# Altium PCB PCB1.PcbDoc (part 3 of 3)
Units mil, origin at the board's own origin, x right, y up, seen from the top; angles counter-clockwise.
Board outline 2810.96 x 1006.14 mil, 4 copper layers (L1, L2, L3, L4), stack 61.583 mil thick; 58 components, 71 nets, 287 pads, 129 vias.
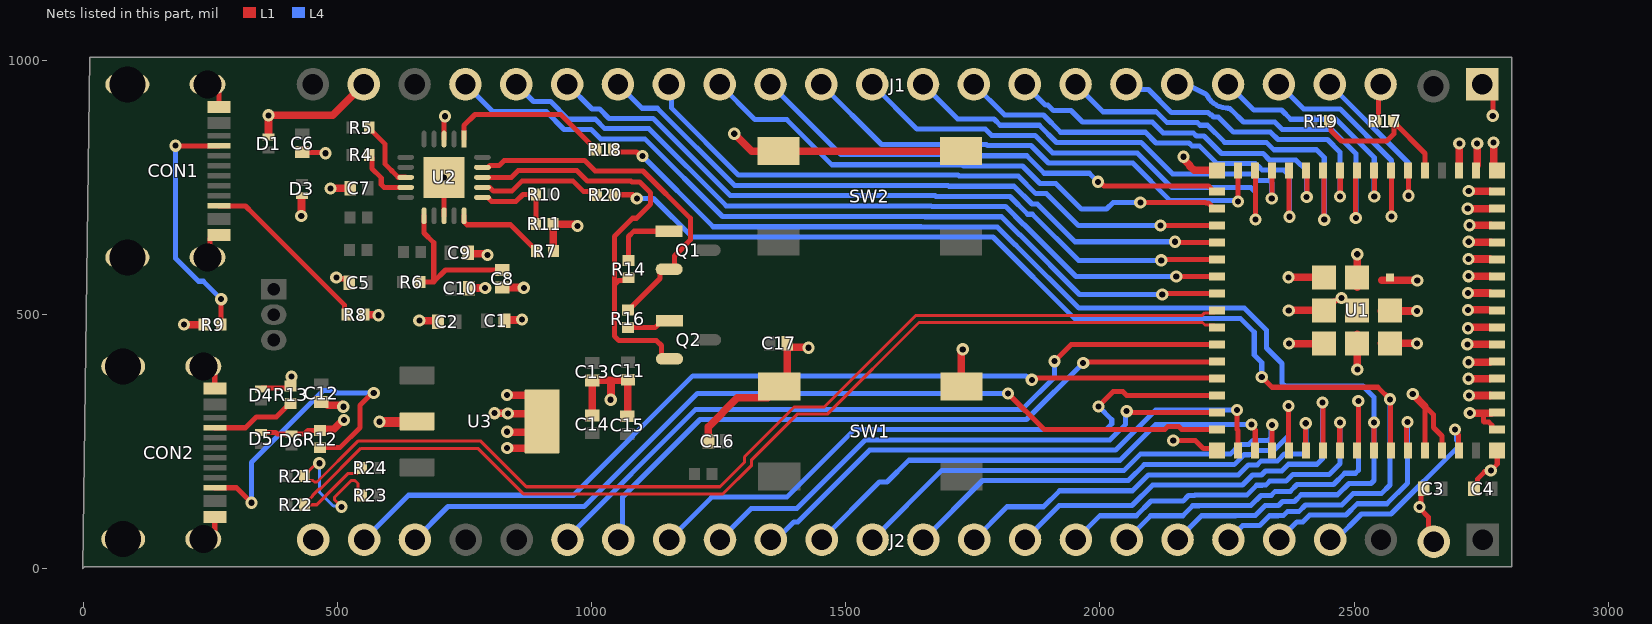
[diagram p4: the nets of this part, all layers, seen from the top]

## Via types
v1: diameter 24, hole 12, L1 to L4, tented both sides, 129 vias

## Nets (pads, with @x,y where several pads share a name; then routed paths per layer and width w, separated by ;. In a path a pad name is that pad's centre, name@x,y a point inside that pad or via, vN(x,y) a via of type N, cw(c..) or ccw(c..) an arc to the next point about the centre after c; other vN are vias at no path point) (continued)
CON_GPIO0: J1.3 R17.2 | length 76.1
  L1 w10: R17.2@2543.35,880.64 2547.73,885.02 2547.73,948.73 J1.3@2552.11,953.11
DTR_FTDI: Q2.2 R14.3 U2.18 | length 842.2
  L1 w10: U2.18@785.41,770 808.34,770 842.19,770 855.47,783.27 971.65,783.27 992.32,762.61 1078.05,762.61 1079.55,761.11 1094.73,761.11 1116.16,739.68 1116.16,717.31 1088.53,689.68 1080.59,689.68 1044.89,653.97 1044.89,558.29 ; R14.3@1072.96,572.47 1067.33,566.84 1053.44,566.84 1044.89,558.29 ; Q2.2@1140.72,413.06 1143.29,413.06 Q2.2@1153.6,413.06 ; Q2.2@1140.72,415.63 1137.5,418.85 1137.5,439.32 1127.47,449.36 1053.75,449.36 1044.96,458.15 1044.96,523.6 1044.89,523.67 1044.89,558.29
ESP_USB_N: R21.3 R23.3 U1.23 | length 2287.1
  L1 w6.03: R21.3@435.11,182.22 435.11,181.04 442.72,173.42 452.45,173.42 455.15,170.72 460.15,170.72 540.53,251.11 782.22,251.11 871.81,161.51 1252.98,161.51 1300.98,209.52 1300.98,220.42 1398.81,318.25 1457.92,318.25 1638.39,498.72 2201.45,498.72 2206.3,503.58 2225.46,503.58 U1.23@2230.32,508.44 ; R21.3@435.11,183.4 452.91,201.2 453.38,201.2 459.88,207.7 v1(464.74,207.7) ; v1(508.51,122.04) 494.53,136.02 494.53,141.09 527.42,173.98 534.7,173.98 540.65,168.03 540.65,152.09 R23.3@548.27,144.47
  L4 w6.03: v1(464.74,207.7) 464.74,151.04 492.27,123.51 507.04,123.51 v1(508.51,122.04)
ESP_USB_P: R22.3 R24.3 U1.24 | length 2172.9
  L1 w6.03: R24.3@548.27,198.5 548.27,197.32 538.97,188.01 521.61,188.01 459.73,126.13 R22.3@435.4,126.13 435.4,127.31 451.54,143.46 451.54,144.55 463.68,156.69 465.96,156.69 546.35,237.08 776.4,237.08 866,147.48 1258.79,147.48 1315.01,203.71 1315.01,214.61 1404.62,304.22 1463.73,304.22 1644.2,484.69 2201.94,484.69 2206.79,479.83 2225.46,479.83 U1.24@2230.32,474.97
FTDI_USB_N: R4.3 U2.9 | length 118.5
  L1 w10: R4.3@562.91,814.43 568.07,809.27 568.07,787.62 586.53,769.16 586.53,756.17 592.39,750.32 U2.9@634.59,750.32
FTDI_USB_P: R5.3 U2.8 | length 135.8
  L1 w10: R5.3@562.91,867.74 562.91,866.56 594.26,835.2 594.26,795.95 607.12,783.09 619.98,770.23 634.36,770.23 U2.8@634.59,770
GND: C1.0 C2.0 C3.0 C4.0 C5.0 C6.0 C7.0 C8.0 C9.0 C10.0 C11.0 C12.0 C13.0 C14.0 C15.0 C16.0 C17.0 CON1.A1B12 CON1.B1A12 CON1.S1 CON1.S2 CON1.S3 CON1.S4 CON2.A1B12 CON2.B1A12 CON2.S1 CON2.S2 CON2.S3 CON2.S4 D1.B9 D3.B9 D4.B9 D5.B9 D6.B9 J1.1 J1.23 J2.2 J2.24 R7.2 R8.2 R9.2 R11.2 R12.2 R13.2 SW1.1 SW1.2 SW2.1 SW2.2 U1.1 U1.2 U1.42 U1.43 U1.46 U1.47 U1.48 U1.49 U1.50 U1.51 U1.52 U1.53 U1.54 U1.55 U1.56 U1.57 U1.58 U1.59 U1.60 U1.61 U1.62 U1.63 U1.64 U1.65 U1.66 U1.67 U1.68 U1.69 U1.70 U1.71 U1.72 U1.73 U2.3 U2.13 U2.21 U3.2 U3.4 | length 4855
  L1 w10: CON2.S2@236.47,58.35 244.27,58.35 259.11,73.19 CON2.B1A12@259.11,102.44 ; CON2.S1@236.47,398.51 244.27,398.51 259.11,383.67 CON2.A1B12@259.11,354.41 ; CON1.S2@244.76,612.65 249.76,617.65 249.76,649.94 256.57,656.75 CON1.B1A12@267.4,656.75 ; CON1.S1@244.76,952.81 252.56,952.81 267.4,937.97 CON1.A1B12@267.4,908.71 ; D4.B9@350.23,353.91 352.12,355.8 404.31,355.8 R13.2@408.04,359.53 ; D5.B9@350.45,268.54 378.81,268.54 382.1,265.25 D6.B9@410.45,265.25 435.29,265.25 442.39,272.35 R12.2@464.98,272.35 ; D1.B9@365.07,849.12 365.07,859.13 ; R13.2@408.3,359.79 408.89,360.39 408.89,377.15 v1(409.74,378) ; C6.0@433.67,820.42 435.29,818.81 475.37,818.81 v1(476.7,817.48) ; R12.2@466.47,272.35 R12.2@466.14,272.35 R12.2@464.98,272.35 ; R12.2@467.4,274.76 R12.2@464.98,272.35 ; C12.0@475.54,328.53 475.54,328.17 C12.0@477.53,326.18 ; v1(486.62,748.26) v1@486.88,748.52 ; v1(498.19,573.34) 500.87,570.66 519.99,570.66 C5.0@526.14,564.51 ; v1@509.68,326.18 509.68,321.67 509.68,321.18 v1(511.96,318.9) ; v1@510.87,292.59 v1(513.41,292.59) ; C7.0@524.27,748.52 C7.0@524.65,748.14 ; R8.2@550,498.84 R8.2@550.7,499.54 ; v1@580.59,499.54 v1(581.29,498.84) ; U2.13@710,694.59 v1(710,770) ; U2.3@710,845.41 710,888.45 v1(711.9,890.34) ; C9.0@758.54,627.98 758.54,624.97 C9.0@763.87,619.64 ; C10.0@758.65,557.97 C10.0@764.1,552.52 ; v1@790.74,552.52 v1(790.94,552.72) ; v1@793.18,619.64 v1(795.54,617.27) ; U3.4@868.8,237.5 U3.4@872.48,233.82 ; U3.4@873.58,305.38 874.52,304.45 874.52,271 U3.4@904.91,240.62 ; R11.2@924.55,678.4 924.92,678.03 R11.2@925.2,677.75 ; R7.2@924.92,625.47 R7.2@925.29,625.09 ; C13.0@1001.6,370.34 C13.0@1002.43,371.17 ; C15.0@1070.56,300.08 C15.0@1071.2,300.72 ; C11.0@1071.01,371.17 C11.0@1071.2,371.36 ; SW1.2@1346.81,336.26 SW1.2@1369.37,358.82 SW1.2@1385.17,374.62 ; v1@1727.63,429.22 v1(1730.27,431.86) ; v1(2144.3,252.65) 2187.72,252.65 2203.39,236.98 2226.18,236.98 U1.64@2230.32,232.85 ; v1@2164.29,806.89 v1(2164.29,810.68) ; v1@2375.09,507.25 v1@2376.28,508.44 ; U1.72@2440.95,508.44 2459.58,527.06 2464.37,527.06 2467.29,529.99 2472.38,529.99 v1(2475.06,532.66) ; v1(2628.77,121.97) v1@2630,120.74 ; C3.0@2637.62,152.85 2636.01,152.85 2631.45,148.29 2631.45,122.2 v1@2630,120.74 ; U1.42@2639.77,232.85 2639.26,233.36 2639.26,320.01 2656.12,303.15 2656.12,278.27 2672.99,261.4 2672.99,233.1 U1.43@2673.24,232.85 ; J2.2@2656.95,64.86 2646.5,75.31 2646.5,101.51 2630,118.01 v1@2630,120.74 ; v1(2724.29,473.29) v1@2726.56,475.55 ; v1(2724.29,509.3) v1@2724.44,509.45 ; v1(2725.51,643.44) v1@2726.84,642.11 ; v1(2727.56,306.37) v1@2727.89,306.05 ; C4.0@2735.85,157.46 2742.45,164.06 2742.45,176.48 2756.92,190.96 2766.18,190.96 v1(2768.86,193.63) ; 2748.66,306.05 2754.38,300.33 2754.38,289.94 2755.82,288.49 2764.9,288.49 2770.76,282.64 2770.76,277.06 2773.63,274.19 U1.46@2781.5,274.19 ; U1.48@2768.06,340.92 U1.48@2769.11,339.87 ; v1@2772.36,190.13 2772.36,196.82 2781.5,205.96 U1.65@2781.5,232.85 ; v1(2772.79,891.05) J1.1@2772.79,933.41
  L1 w15: v1@199.13,480.04 R9.2@236.73,480.04 ; v1(364.54,892.12) 491.12,892.12 J1.23@552.11,953.11 ; v1@364.81,891.85 364.81,859.4 365.07,859.13 ; v1@429.78,694.81 429.78,713.61 D3.B9@429.78,732.41 ; R12.2@467.4,274.76 493.05,274.76 v1@510.87,292.59 ; C12.0@477.53,326.18 481.62,322.09 509.26,322.09 509.68,321.67 511.96,319.4 v1(511.96,318.9) ; v1@486.88,748.52 C7.0@524.27,748.52 ; R8.2@550.7,499.54 v1@580.59,499.54 ; v1@662.08,487.74 C2.0@699.68,487.74 ; C9.0@763.87,619.64 v1@793.18,619.64 ; C10.0@764.1,552.52 v1@790.74,552.52 ; v1(809.46,306.21) 809.88,305.8 838.37,305.8 v1@838.79,305.38 ; C1.0@828.73,487.86 830.45,489.58 862.28,489.58 v1(863.45,490.75) ; C8.0@828.73,553.43 v1@866.33,553.43 ; v1(833.87,341.99) 834.15,341.7 U3.4@872.48,341.7 ; v1(834.23,237.5) U3.4@868.8,237.5 ; v1@834.88,268.97 U3.4@872.48,268.97 ; v1(835.44,305.38) v1@838.79,305.38 ; v1@839.6,304.57 v1@838.79,305.38 ; U3.4@873.58,305.38 v1@838.79,305.38 ; R7.2@924.92,625.47 R11.2@924.92,678.03 ; R11.2@925.2,677.75 966.51,677.75 969.93,674.34 v1(972.36,674.34) ; C14.0@1001.6,301.46 C13.0@1001.6,370.34 ; C13.0@1002.43,371.17 C11.0@1071.01,371.17 ; v1@1038.47,333.35 1038.47,370.95 ; C15.0@1071.2,300.72 C11.0@1071.2,371.36 ; C16.0@1229.96,251.12 1229.68,251.4 1229.68,278.99 1286.95,336.26 SW1.2@1346.81,336.26 ; v1(1280.77,855.83) 1315.05,821.54 SW2.2@1368.19,821.54 SW2.1@1726.46,821.54 ; SW1.2@1385.17,374.62 C17.0@1385.17,443.62 ; C17.0@1388.57,435.55 v1@1426.17,435.55 ; SW1.1@1727.63,358.82 v1@1727.63,429.22 ; v1@2164.29,806.89 2177.04,794.14 2177.04,792.32 2185.33,784.03 U1.63@2230.32,784.03 ; v1@2371.2,573.4 U1.71@2440.95,573.4 ; v1@2372.29,443.07 U1.73@2442.04,443.07 ; v1@2376.28,508.44 U1.72@2440.95,508.44 ; U1.69@2506.09,553.98 v1@2506.09,618.67 ; v1@2506.4,392.07 U1.70@2506.4,461.82 ; U1.68@2553.9,443.64 v1@2623.65,443.64 ; U1.67@2553.9,507.17 v1@2623.65,507.17 ; 2554.44,567.45 v1@2624.19,567.45 ; v1(2615.34,343.93) 2639.26,320.01 ; U1.2@2706.9,794.02 v1(2706.9,836.38) ; v1(2722.66,441.66) 2765.01,441.66 ; v1(2723.5,708.51) U1.59@2765.86,708.51 ; v1(2724.07,542.64) U1.54@2766.43,542.64 ; v1@2724.44,509.45 2762.9,509.45 ; v1(2724.76,374.08) U1.49@2767.12,374.08 ; v1(2724.78,406.35) U1.50@2767.13,406.35 ; v1(2724.8,575.71) U1.55@2767.16,575.71 ; v1(2724.8,609.56) U1.56@2767.16,609.56 ; v1(2725.45,743.01) U1.60@2767.81,743.01 ; v1(2725.71,340.92) U1.48@2768.06,340.92 ; v1@2726.56,475.55 2764.31,475.55 ; v1(2726.75,675.96) U1.58@2769.11,675.96 ; v1@2726.84,642.11 U1.57@2769.76,642.11 ; v1@2727.89,306.05 U1.47@2769.84,306.05 ; U1.1@2742.03,794.06 v1(2742.03,836.42) ; U1.62@2774.3,796.01 v1(2774.3,838.36)
  L1 w20: v1@583.6,288.8 621.19,288.8
  other v1: 834.23,269.62 582.94,289.45 1037.81,332.7 2506.31,391.98 1426.82,434.9 2372.2,443.16 2623.73,443.55 198.48,480.69 661.43,488.39 2623.73,507.09 2371.39,508.28 866.98,552.78 2624.28,567.36 2371.12,573.48 2506.17,618.76 429.13,694.16
GPIO0: R17.3 R19.3 U1.4 | length 305.9
  L1 w10: R19.3@2448.78,880.64 2454.41,875.01 2454.41,861.87 2475.05,841.24 2563.55,841.24 2578.23,855.92 2578.23,879.78 R17.3@2577.37,880.64 ; R17.3@2577.37,879.46 2639.65,817.18 2639.65,784.15 U1.4@2639.77,784.03
GPIO1: J1.4 U1.5 | length 330
  L1 w10: v1@2607.18,734.2 U1.5@2607.18,780.9
  L4 w10: J1.4@2452.11,953.11 2606.84,798.38 v1(2606.84,733.86)
GPIO2: J1.5 U1.6 | length 476.5
  L1 w10: v1@2573.15,693.73 U1.6@2573.15,776.48
  L4 w10: J1.5@2352.11,953.11 2400.94,904.29 2472.65,904.29 2573.72,803.22 v1(2573.72,693.16)
GPIO3: J1.6 U1.7 | length 470.2
  L1 w10: v1@2539.96,733.03 U1.7@2539.96,779.73
  L4 w10: J1.6@2252.11,953.11 2302.72,902.5 2357.14,902.5 2375.35,884.29 2464.37,884.29 2539.62,809.04 v1(2539.62,732.69)
GPIO4: J1.7 U1.8 | length 614.2
  L1 w10: v1@2502.79,690.56 U1.8@2502.79,773.32
  L4 w10: J1.7@2152.11,953.11 2160.48,955.88 2164.47,955.88 2208.03,933.99 2209.17,932.85 ; 2209.19,932.82 2210.23,931.78 ccw(c2252.11,953.11) 2248.48,906.25 2252.26,905.96 ccw(c2254.58,918.05) 2255.44,905.77 2258.37,902.84 2282.28,878.93 2343.96,878.93 2358.6,864.29 2456.08,864.29 2503.36,817.02 v1(2503.36,689.99)
GPIO5: J1.8 U1.9 | length 609.2
  L1 w10: v1@2472.73,733.03 U1.9@2472.73,779.73
  L4 w10: J1.8@2052.11,953.11 2062.45,942.78 2095.44,942.78 2140.54,897.68 2212.8,897.68 2217.91,892.57 2220.06,892.57 2223.64,888.98 2232.7,888.98 2262.76,858.93 2335.68,858.93 2350.32,844.29 2447.8,844.29 2472.39,819.7 v1(2472.39,732.69)
GPIO6: J1.9 U1.10 | length 753.9
  L1 w10: v1@2440.67,687.39 U1.10@2440.67,770.15
  L4 w10: J1.9@1952.11,953.11 2006.04,899.19 2110.74,899.19 2132.25,877.68 2192.04,877.68 2197.15,872.57 2211.77,872.57 2245.41,838.93 2327.39,838.93 2342.03,824.29 2426.24,824.29 2441.24,809.29 v1(2441.24,686.82)
GPIO7: J1.10 U1.11 | length 723.3
  L1 w10: v1@2407.07,731.86 U1.11@2407.07,778.56
  L4 w10: J1.10@1852.11,953.11 1892.69,912.54 1897.52,912.54 1908.42,901.64 1943.01,901.64 1965.91,878.74 2102.9,878.74 2123.97,857.68 2183.76,857.68 2189.95,851.49 2204.56,851.49 2239.11,816.94 2321.1,816.94 2333.75,804.29 2385.46,804.29 2406.73,783.03 v1(2406.73,731.52)
GPIO8: J1.11 U1.12 | length 858.9
  L1 w10: v1@2372.21,693.1 U1.12@2372.21,775.85
  L4 w10: J1.11@1752.11,953.11 1812.69,892.54 1889.23,892.54 1923.03,858.74 2089.48,858.74 2110.55,837.68 2175.47,837.68 2181.66,831.49 2196.28,831.49 2230.83,796.94 2306.14,796.94 2312.15,790.93 2312.74,790.93 2319.38,784.29 2362.18,784.29 2372.78,773.69 v1(2372.78,692.53)
GPIO9: J1.12 U1.13 | length 843
  L1 w10: v1@2338.38,728.98 U1.13@2338.38,775.68
  L4 w10: J1.12@1652.11,953.11 1720.43,884.8 1791.69,884.8 1803.95,872.54 1880.95,872.54 1914.74,838.74 2081.2,838.74 2143,776.94 2297.85,776.94 2303.86,770.93 2304.45,770.93 2311.1,764.29 2332.18,764.29 2338.03,758.43 v1(2338.03,728.64)
GPIO10: J1.13 U1.14 | length 978.2
  L1 w10: v1@2305.65,688.03 U1.14@2305.65,770.78
  L4 w10: J1.13@1552.11,953.11 1640.43,864.8 1774.92,864.8 1787.18,852.54 1872.67,852.54 1907.13,818.07 2073.58,818.07 2141.88,749.78 2297.33,749.78 2306.22,740.88 v1(2306.22,687.46)
GPIO11: J1.14 U1.15 | length 963.4
  L1 w10: v1(2271.48,722.78) 2271.82,723.12 U1.15@2271.82,771.24
  L4 w10: J1.14@1452.11,953.11 1570.41,834.82 1776.61,834.82 1778.89,832.54 1864.38,832.54 1898.85,798.07 2064.74,798.07 2138.6,724.21 2270.04,724.21 v1(2271.48,722.78)
GPIO12: J1.15 U1.16 | length 966.4
  L1 w10: v1(1996.16,761.23) 1999.95,761.23 2007.9,753.28 2213.72,753.28 2219.58,747.42 2219.58,745.56 2222.45,742.69 U1.16@2230.32,742.69
  L4 w10: J1.15@1352.11,953.11 1490.41,814.82 1737.65,814.82 1739.93,812.54 1856.1,812.54 1890.57,778.06 1979.3,778.06 v1@1996.13,761.23
GPIO13: J1.16 U1.17 | length 1091
  L1 w10: v1(2079.47,720.73) 2207.44,720.73 2208.36,719.82 2213.72,719.82 2219.58,713.96 2219.58,712.1 2222.45,709.22 U1.17@2230.32,709.22
  L4 w10: J1.16@1252.11,953.11 1321.63,883.6 1384.06,883.6 1472.84,794.82 1729.37,794.82 1731.65,792.54 1847.81,792.54 1882.29,758.06 1913.23,758.06 1963.51,707.79 2013.12,707.79 2026.07,720.73 v1(2079.47,720.73)
GPIO14: J1.17 U1.18 | length 1215.9
  L1 w10: v1@2120.56,675.76 U1.18@2230.32,675.76
  L4 w10: J1.17@1152.11,953.11 1157.65,947.57 1157.65,906.11 1288.94,774.82 1721.08,774.82 1723.36,772.54 1839.53,772.54 1874,738.06 1895.03,738.06 1957.53,675.57 v1(2118.97,675.57)
GPIO15: J1.18 U1.19 | length 1306.4
  L1 w10: v1@2148.4,642.99 2149.1,642.3 U1.19@2230.32,642.3
  L4 w10: J1.18@1052.11,953.11 1099.31,905.91 1129.56,905.91 1281.11,754.37 1701.58,754.37 1703.41,752.54 1831.25,752.54 1866.25,717.54 1876.97,717.54 1951.16,643.35 v1(2147.96,643.35)
GPIO16: J1.19 U1.20 | length 1426.5
  L1 w10: v1@2115.71,608.83 U1.20@2230.32,608.83
  L4 w10: J1.19@952.11,953.11 1000.94,904.29 1016.04,904.29 1034.42,885.91 1121.28,885.91 1272.83,734.37 1675.98,734.37 1677.81,732.54 1822.96,732.54 1857.96,697.54 1867.16,697.54 1957.85,606.84 v1(2120.58,606.84)
GPIO17: J1.20 U1.21 | length 1534.2
  L1 w10: v1@2150.71,575.37 U1.21@2230.32,575.37
  L4 w10: J1.20@852.11,953.11 886.19,919.03 919.72,919.03 954.47,884.29 1007.76,884.29 1026.13,865.91 1113,865.91 1264.88,714.03 1668.03,714.03 1669.52,712.54 1814.68,712.54 1849.68,677.54 1850.55,677.54 1952.92,575.16 v1(2150.11,575.16)
GPIO18: J1.21 U1.22 | length 1651.3
  L1 w10: v1@2120.9,541.9 U1.22@2230.32,541.9
  L4 w10: J1.21@752.11,953.11 806.19,899.03 911.44,899.03 946.19,864.29 999.48,864.29 1017.85,845.91 1104.71,845.91 1257.65,692.98 1655.98,692.98 1656.42,692.54 1806.39,692.54 1841.4,657.54 1842.26,657.54 1960.08,539.72 v1(2122.72,539.72)
GPIO21: J2.19 U1.25 | length 1457.4
  L1 w10: v1(1910.52,408.48) 1943.55,441.51 U1.25@2230.32,441.51
  L4 w10: J2.19@952.83,57.49 952.83,61.42 1205.14,313.74 1847.46,313.74 1910.52,376.79 v1(1910.52,408.48)
GPIO26: J2.18 U1.26 | length 1367
  L1 w10: v1(1967.15,405.14) 1968.6,406.59 2228.87,406.59 U1.26@2230.32,408.04
  L4 w10: J2.18@1052.83,57.49 1061.2,65.86 1061.2,141.51 1213.43,293.74 1855.75,293.74 v1(1967.15,405.14)
GPIO33: J2.17 U1.28 | length 1258.1
  L1 w10: v1(1997.14,319.64) 2026.01,348.51 2045.34,348.51 2052.74,341.11 U1.28@2230.32,341.11
  L4 w10: J2.17@1152.83,57.49 1236.42,141.08 1384.21,141.08 1516.87,273.74 2011.71,273.74 2023.23,285.26 2023.23,293.54 v1(1997.14,319.64)
GPIO34: J2.16 U1.29 | length 1097.2
  L1 w10: v1(2052.66,310.19) 2055.2,307.65 U1.29@2230.32,307.65
  L4 w10: J2.16@1252.83,57.49 1314.11,118.77 1403.89,118.77 1538.85,253.74 2020,253.74 2049.98,283.72 2049.98,307.51 v1(2052.66,310.19)
GPIO35: J2.15 U1.31 | length 1103.1
  L1 w10: v1(2269.95,312.28) 2269.95,274.29 2272.03,272.21 2272.03,233.21 U1.31@2271.66,232.85
  L4 w10: J2.15@1352.83,57.49 1363.24,57.49 1398.06,92.32 1405.71,92.32 1547.13,233.74 2031.08,233.74 2109.63,312.28 v1(2269.95,312.28)
GPIO36: J2.14 U1.32 | length 988.9
  L1 w10: v1(2298.28,284.14) 2298.28,280.36 2305.54,273.09 U1.32@2305.54,237.63
  L4 w10: J2.14@1452.83,57.49 1566.17,170.84 1581.23,170.84 1624.13,213.74 2039.37,213.74 2109.77,284.14 v1(2298.28,284.14)
GPIO37: J2.13 U1.33 | length 939.6
  L1 w10: U1.33@2338.46,236.28 v1@2338.46,282.98
  L4 w10: J2.13@1552.83,57.49 1689.07,193.74 2047.65,193.74 2079.57,225.65 2256.53,225.65 2275.37,244.49 2285.3,244.49 2285.52,244.72 2293.01,244.72 2300.86,252.57 2330.94,252.57 2336.8,258.42 2336.8,281.31 v1(2338.8,283.32)
GPIO38: J2.12 U1.34 | length 943.6
  L1 w10: U1.34@2371.36,236.85 v1@2371.36,319.6
  L4 w10: J2.12@1652.83,57.49 1769.07,173.74 2055.94,173.74 2087.19,204.99 2264.15,204.99 2283.66,224.49 2293.58,224.49 2293.8,224.72 2301.29,224.72 2309.14,232.57 2341.33,232.57 2370.79,262.02 v1(2370.79,320.17)
GPIO39: J2.11 U1.35 | length 825.6
  L1 w10: U1.35@2404.51,239.41 v1@2404.51,286.1
  L4 w10: J2.11@1752.83,57.49 1817.5,122.17 1889.22,122.17 1920.79,153.74 2064.22,153.74 2095.47,184.99 2272.43,184.99 2291.94,204.49 2301.86,204.49 2302.09,204.72 2309.57,204.72 2317.42,212.57 2349.62,212.57 2362.85,225.8 2399,225.8 2404.86,231.66 v1(2404.86,286.44)
GPIO40: J2.10 U1.36 | length 844.4
  L1 w10: U1.36@2438.55,243.82 v1@2438.55,326.58
  L4 w10: J2.10@1852.83,57.49 1919.83,124.49 2063.26,124.49 2103.76,164.99 2280.72,164.99 2300.22,184.49 2310.15,184.49 2310.37,184.72 2317.86,184.72 2325.71,192.57 2357.9,192.57 2371.14,205.8 2427.21,205.8 2437.98,216.57 v1(2437.98,327.15)
GPIO41: J2.9 U1.37 | length 708.6
  L1 w10: U1.37@2471.74,240.58 v1@2471.74,287.27
  L4 w10: J2.9@1952.83,57.49 1999.83,104.49 2071.54,104.49 2100.64,133.59 2163.71,133.59 2174.32,144.19 2186.1,144.19 2186.9,144.99 2289,144.99 2308.51,164.49 2318.43,164.49 2318.66,164.72 2326.14,164.72 2333.99,172.57 2366.19,172.57 2379.42,185.8 2450.99,185.8 2472.08,206.9 v1(2472.08,287.62)
GPIO42: J2.8 U1.38 | length 731.2
  L1 w10: U1.38@2508.91,246.99 v1@2508.91,329.75
  L4 w10: J2.8@2052.83,57.49 2099.83,104.49 2162.91,104.49 2182.6,124.19 2194.39,124.19 2195.18,124.99 2297.29,124.99 2316.79,144.49 2326.8,144.49 2327.02,144.72 2337.03,144.72 2344.88,152.57 2374.47,152.57 2387.7,165.8 2459.27,165.8 2481.49,188.02 2502.48,188.02 2508.34,193.88 v1(2508.34,330.32)
GPIO45: J2.5 U1.41 | length 466.4
  L1 w10: U1.41@2604.63,241.75 2603.43,242.95 2603.43,259.37 2603,259.8 2603,286.82 v1@2604.63,288.45
  L4 w10: J2.5@2352.83,57.49 2387.9,92.57 2399.32,92.57 2412.56,105.8 2484.12,105.8 2506.34,128.02 2564.35,128.02 2604.97,168.64 v1(2604.97,288.79)
GPIO46: J2.4 U1.44 | length 401
  L1 w10: v1(2698.68,273.89) 2698.68,270.11 2705.19,263.59 2705.19,243.59 2705.66,243.13 U1.44@2709.11,243.13
  L4 w10: J2.4@2452.83,57.49 2464.1,57.49 2514.63,108.02 2572.63,108.02 2704.78,240.17 2704.78,250.05 2701.36,253.48 2701.36,271.21 v1(2698.68,273.89)
GPIO47: J2.23 U1.27 | length 1816
  L1 w10: v1(1866.1,371.83) 1869.89,371.83 1873.57,375.51 2229.39,375.51 U1.27@2230.32,374.58
  L4 w10: J2.23@552.83,57.49 640.07,144.74 964.42,144.74 1199.29,379.6 1854.54,379.6 1862.31,371.83 v1(1866.1,371.83)
GPIO48: J2.22 U1.30 | length 1730.6
  L1 w10: v1(1819.46,345.18) 1890.45,274.19 2127.65,274.19 2133.12,279.65 2155.49,279.65 2160.95,274.19 U1.30@2230.32,274.19
  L4 w10: J2.22@652.83,57.49 717.79,122.46 985.58,122.46 1208.3,345.18 v1(1819.46,345.18)
NetC8_1: C8.1 R6.3 U2.11 | length 310.9
  L1 w10: R6.3@662.44,563.94 688.99,563.94 ; U2.11@670.63,694.59 670.63,660.78 689.73,641.68 689.73,564.67 688.99,563.94 ; C8.1@824.59,587.86 712.91,587.86 688.99,563.94
NetCON1_A5: CON1.A5 R9.3 | length 480.7
  L1 w10: v1(181.84,832.4) 182.3,831.94 CON1.A5@267.4,831.94 ; R9.3@271.65,480.23 v1(271.65,530.46)
  L4 w10: v1(181.84,832.4) 181.84,610.77 226.9,565.71 236.4,565.71 v1(271.65,530.46)
NetCON1_B5: CON1.B5 R8.3 | length 348.1
  L1 w10: CON1.B5@267.4,713.83 319.51,713.83 335,698.34 513.99,519.35 513.99,504.79 R8.3@518.53,500.24
NetCON2_A5: CON2.A5 R13.3 | length 168.8
  L1 w10: CON2.A5@259.11,277.64 319.64,277.64 340.76,298.76 380.1,298.76 406.86,325.52 R13.3@408.04,325.52
NetCON2_B5: CON2.B5 R12.3 | length 640.4
  L1 w10: CON2.B5@259.11,159.53 301.68,159.53 v1(331.14,130.07) ; R12.3@466.47,238.33 505.11,238.33 544.59,277.82 544.59,321.73 568.76,345.9 v1(571.69,345.9)
  L4 w10: v1(331.14,130.07) 331.14,209.51 472.54,350.9 493.67,350.9 498.67,345.9 v1(571.69,345.9)
NetQ1_1: Q1.1 R14.2 | length 131.4
  L1 w10: R14.2@1072.96,606.49 1072.96,653.76 1083.32,664.12 Q1.1@1152.79,664.12
NetQ2_1: Q2.1 R16.2 | length 87.2
  L1 w10: R16.2@1071.77,474.99 1125.27,474.99 1138.15,487.87 Q2.1@1153.6,487.87
NetR7_3: R7.3 U2.15 | length 178.3
  L1 w10: U2.15@749.37,694.59 749.37,682.74 755.23,676.88 808.34,676.88 840.67,676.88 874.33,643.22 891.27,626.27 R7.3@891.27,625.09
RTS_FTDI: Q1.2 R16.3 U2.19 | length 703.9
  L1 w10: U2.19@785.41,789.69 796.72,789.69 800.4,793.37 808.34,793.37 818.41,793.37 828.31,803.27 986.56,803.27 1007.23,782.61 1101.52,782.61 1194.51,689.62 1194.51,646.65 1163.44,615.58 1163.44,595.11 1157.66,589.32 Q1.2@1152.79,589.32 1140.73,589.32 1134.94,583.53 1134.94,570.99 1072.95,509 R16.3@1071.77,509
RXD_FTDI: R18.3 U2.1 | length 323.6
  L1 w10: U2.1@749.37,845.41 749.37,872.33 770.75,893.71 939.78,893.71 R18.3@1008.65,824.84
TXD_FTDI: R20.3 U2.17 | length 236.5
  L1 w10: U2.17@796.94,750.09 800.02,750.09 807.18,742.93 843.41,742.93 863.75,763.27 963.37,763.27 984.73,741.92 1004.73,741.92 1010.36,736.29 R20.3@1010.36,735.8
U0RXD: J2.6 R20.2 U1.40 | length 2367.9
  L1 w10: R20.2@1044.37,735.8 1081.86,735.8 v1(1089.16,728.49) ; v1(2318.42,377.23) 2338.34,357.32 2546.63,357.32 v1(2570.46,333.48) 2571.65,332.29 2571.65,234.04 U1.40@2572.84,232.85
  L4 w10: v1(1089.16,728.49) 1122.07,728.49 1198.02,652.54 1789.82,652.54 1949.64,492.72 2276.16,492.72 2303.54,465.33 2303.54,420.74 2318.42,405.86 v1(2318.42,377.23) ; J2.6@2252.83,57.49 2280.32,84.99 2313.86,84.99 2333.36,104.49 2350.7,104.49 2350.93,104.72 2360.83,104.72 2368.68,112.57 2391.04,112.57 2404.27,125.8 2475.84,125.8 2498.06,148.02 2553.53,148.02 2570.46,164.94 v1(2570.46,333.48)
U0TXD: J2.7 R18.2 U1.39 | length 2385.6
  L1 w10: R18.2@1041.68,820.01 1088.64,820.01 1096.8,811.85 v1(1100.59,811.85) ; U1.39@2538.97,240.58 v1@2538.97,287.27
  L4 w10: v1(1100.59,811.85) 1239.46,672.98 1647.69,672.98 1648.13,672.54 1798.11,672.54 1833.86,636.78 1834.73,636.78 1958.79,512.72 2284.44,512.72 2327.59,469.57 2327.59,434.42 2358.24,403.77 2358.24,365.33 2364.09,359.47 2517.36,359.47 2539.31,337.53 v1(2539.31,287.62) 2539.31,173.88 2533.45,168.02 2489.77,168.02 2467.55,145.8 2395.99,145.8 2382.75,132.57 2358.94,132.57 2351.09,124.72 2342.64,124.72 2342.42,124.49 2325.08,124.49 2305.57,104.99 2267.23,104.99 2266.73,104.49 2199.83,104.49 J2.7@2152.83,57.49
VBUS_SENSE: R10.2 R11.3 U2.16 | length 172.5
  L1 w10: U2.16@785.41,730.63 796.72,730.63 796.94,730.4 796.94,729.58 803.59,722.93 808.34,722.93 851.69,722.93 865.22,736.46 R10.2@890.53,736.46 R11.3@890.53,678.4
pads on no net: CON1.A8 CON1.B8 CON2.A8 CON2.B8 J1.24 U2.2 U2.4 U2.5 U2.6 U2.7 U2.14

## Polygon pours and split planes (outlines as drawn)
CHIP_PU on L1 "CHIP_PU_L01_P011" (solid, pour order 11): 1810.73,207.48 2163.83,207.48 2184.24,187.07 2184.45,187.28 2591,187.28 2591,177.02 2551.83,137.86 1810.68,137.86
GND on L1 "GND_L01_P010" (solid, pour order 10): 1140.19,888.06 1239.07,789.18 1834.28,789.18 1834.28,810.42 1756.57,888.13
GND on L1 "GND_L01_P009" (solid, pour order 9): 2341.94,632.36 2341.94,632.54 2641.89,632.54 2641.89,380.48 2640.96,379.55 2366.29,379.55 2343.05,402.8
+5V on L1 "+5V_L01_P008" (solid, pour order 8): 830.34,380.61 905.77,456.04 1022.79,456.04 1022.79,428.94 1033.71,418.01 1093.16,418.01 1093.16,396.6 1093.16,395.28 941.26,395.28 926.59,380.61
+3V3_FTDI on L1 "+3V3_FTDI_L01_P000" (solid, pour order 0): 782.71,812.71 826.55,868.78 882.21,868.78 882.21,823.69 876.8,818.28 802.99,818.28 802.99,815.64 800.06,812.71
CHIP_PU on L1 "CHIP_PU_L01_P007" (solid, pour order 7): 1362.53,188.24 1453.68,279.38 1811,279.38 1811,147.15 1811,146.18 1362.53,146.18
+5V on L1 "+5V_L01_P006" (solid, pour order 6): 616.93,859.52 616.93,978 665.29,978 676.04,967.26 674.61,965.83 674.61,882.34 638.81,846.54 627.05,846.54 622.63,853.82
+3V3_REG on L1 "+3V3_REG_L01_P005" (solid, pour order 5): 1084.14,278.22 1105.69,256.68 1105.69,199.14 987.86,199.14 969.29,217.71 969.29,278.22
BTN_GPIO0 on L1 "BTN_GPIO0_L01_P003" (solid, pour order 3): 1316.67,630.82 1897.42,630.82 1898.26,629.98 1908.33,640.06 1908.33,754.19 1347.72,754.19 1317.51,723.98 1317.51,627.47
+3V3 on L1 "+3V3_L01_P002" (solid, pour order 2): 2676.53,128.12 2676.89,128.47 2785.48,128.47 2785.48,25.58 2784.77,24.86 2784.41,25.22 2715.34,25.22 2715.34,87.53 2677.24,125.62 2677.24,128.47
+3V3 on L1 "+3V3_L01_P001" (solid, pour order 1): 721.29,500.72 805.4,500.72 805.4,448.37 799.12,442.08 721.29,442.08
+3V3 on L2 "+3V3_L02_P012" (solid, pour order 12): 52.04,973 2776.12,973 2776.12,63.82 42.13,63.82
+5V_VBUS1 on L4 "+5V_VBUS1_L04_P013" (solid, pour order 13): 776.95,682.92 869.85,775.82 1004.29,775.82 1004.29,278.15 988.73,262.59 776.95,262.59
GND on L3 (split plane): 2789.91,23.87 19.47,23.87 32.7,986.36 2789.91,986.36